# Altium PCB MainBoard_PCB1.PcbDoc
Units mil, origin at the board's own origin, x right, y up, seen from the top; angles counter-clockwise.
Board outline 6000 x 4000 mil, 2 copper layers (Top Layer, Bottom Layer), stack 65.8 mil thick; 35 components, 23 nets, 168 pads, 7 vias.
Unrouted connection lines stored in the file: 43.
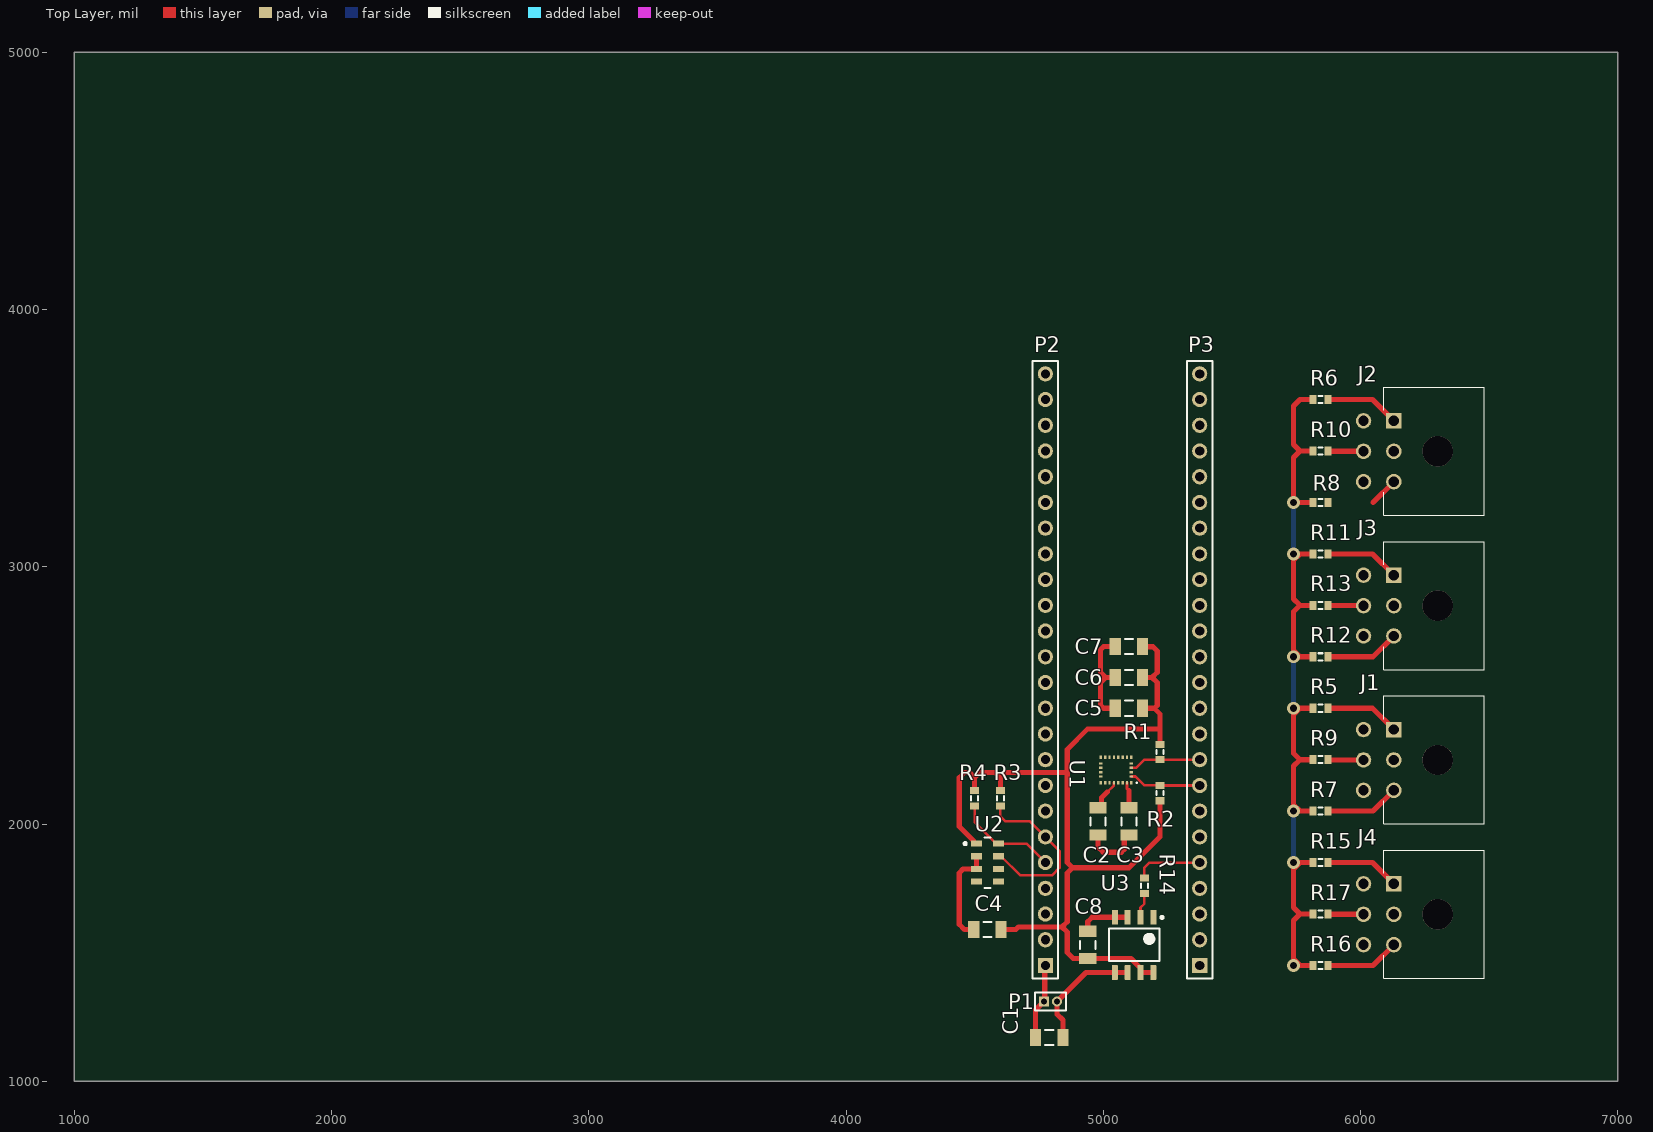
[diagram p0: Top Layer view]
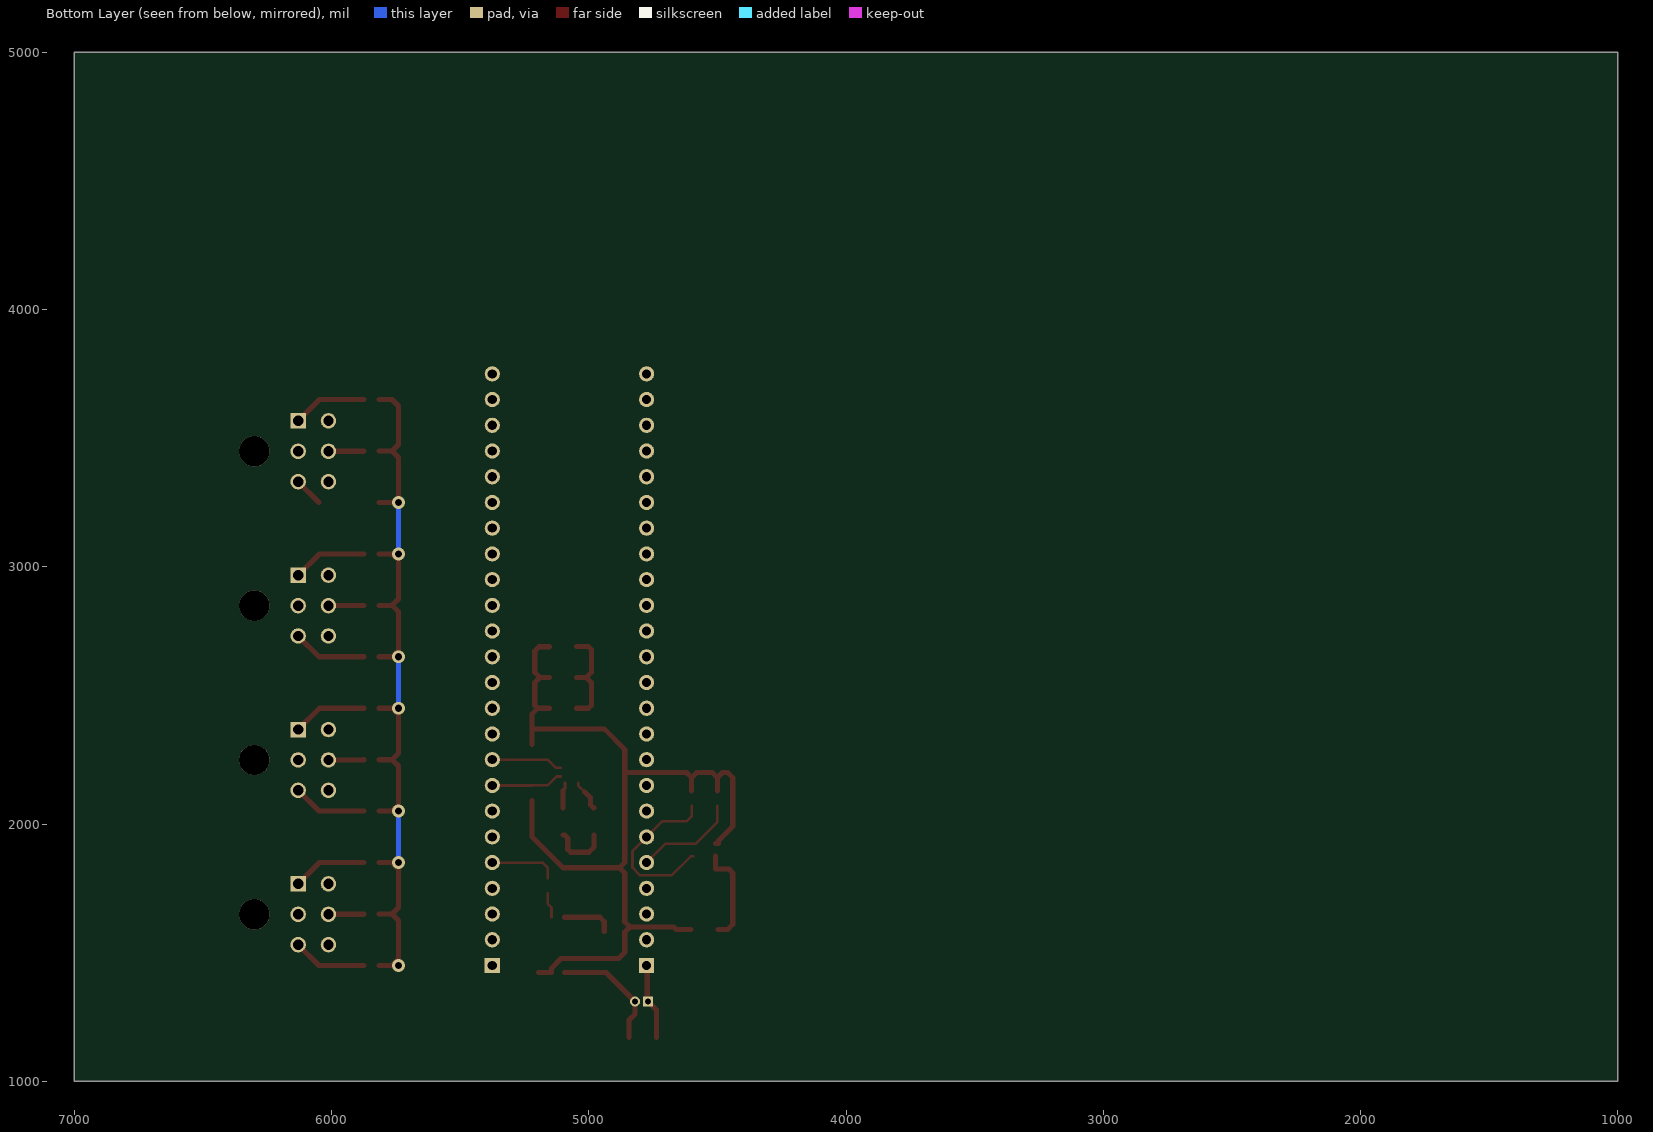
[diagram p1: Bottom Layer view, seen from below]

## Layer stack, top to bottom
Top Solder: solder mask 0.4, Solder Resist, Dk 3.5
Top Layer: signal copper 1.4
Dielectric 1: dielectric 63, FR-4, Dk 4.8
Bottom Layer: signal copper 1.4
Bottom Solder: solder mask 0.4, Solder Resist, Dk 3.5

## Board outline
1000,1000 7000,1000 7000,5000 1000,5000

## Design rules (kind name [scope] priority, off if disabled: settings)
Clearance [All] p1: gap=6 ignorepadtopadclearanceinfootprint=FALSE
PolygonConnect [All] p1: connectstyle=Relief reliefconductorwidth=10 reliefentries=4 polygonreliefangle="90 Angle" airgapwidth=10
RoomDefinition MainBoard_Sheet1 [InComponentClass('MainBoard_Sheet1')] p1: confinementstyle=ConfineIn formatcopy=TRUE lockcomponents=FALSE outline 7025,1075 8275,1075 8275,1725 7025,1725
RoutingVias [All] p1: holewidth=28 width=50 viastyle="Through Hole" minholewidth=28 minwidth=50 maxholewidth=28 maxwidth=50
SolderMaskExpansion [All] p1: expansion=4 istentingtop=FALSE
Width [All] p1: maxlimit=39.37 minlimit=6 preferedwidth=20
30 further rules are at their usual default settings.

## Components (designator, comment, footprint, x,y, rotation, side; value= is the part's Value field where it differs from the comment)
C1 "Cap Semi" C1206 4790,1170 r0 top value=0.1uF
C2 "Cap Semi" C1206 4980,2010 r90 top value=10uF
C3 "Cap Semi" C1206 5100,2010 r90 top value=0.1uF
C4 "Cap Semi" C1206 4550,1590 r0 top value=0.1uF
C5 "Cap Semi" C1206 5100,2450 r0 top value=10uF
C6 "Cap Semi" C1206 5100,2570 r0 top value=0.1uF
C7 "Cap Semi" C1206 5100,2690 r0 top value=0.1uF
C8 "Cap Semi" C1206 4940,1530 r270 top value=10uF
J1 "0430450600" 0430450600 6215,2250 r90 top
J2 "0430450600" 0430450600 6215,3450 r90 top
J3 "0430450600" 0430450600 6215,2850 r90 top
J4 "0430450600" 0430450600 6215,1650 r90 top
P1 "MHDR1X2" MHDR1X2 4770,1310 r0 top
P2 "Header 24" HDR1X24 4775,1450 r90 top
P3 "Header 24" HDR1X24 5375,1450 r90 top
R1 "Res3" J1-0603 5220,2280 r90 top value=10K
R2 "Res3" J1-0603 5220,2120 r270 top value=10K
R3 "Res3" J1-0603 4600,2100 r90 top value=10K
R4 "Res3" J1-0603 4500,2100 r90 top value=10K
R5 "Res3" J1-0603 5844.53,2450 r0 top value=10K
R6 "Res3" J1-0603 5844.53,3650 r0 top value=10K
R7 "Res3" J1-0603 5844.53,2050 r0 top value=10K
R8 "Res3" J1-0603 5844.53,3250 r0 top value=10K
R9 "Res3" J1-0603 5844.53,2250 r0 top value=10K
R10 "Res3" J1-0603 5844.53,3450 r0 top value=10K
R11 "Res3" J1-0603 5844.53,3050 r0 top value=10K
R12 "Res3" J1-0603 5844.53,2650 r0 top value=10K
R13 "Res3" J1-0603 5844.53,2850 r0 top value=10K
R14 "Res3" J1-0603 5160,1760 r270 top value=250K
R15 "Res3" J1-0603 5844.53,1850 r0 top value=10K
R16 "Res3" J1-0603 5844.53,1450 r0 top value=10K
R17 "Res3" J1-0603 5844.53,1650 r0 top value=10K
U1 "LSM9DS1TR" STM-LGA-24_3500X3000X1000 5050,2210 r180 top
U2 "MS560702BA03-50" TECO-MS560702BA03-50_V 4550,1850 r0 top
U3 "TPS76633DR" D0008A_N 5120,1530 r270 top

## Footprints (in the part's own frame and the unit in brackets; to place one, negate y for a bottom-side part, rotate by r counter-clockwise, add the part's x,y. Pads: shape width x height; smd on the part's side, far side on the other; paste and mask are expansions set on the pad)
0430450600 [mm] "6-Pin Molex 3.00mm Pitch"
  round 3 hole 3 unplated mask+0.05: 0(-0.025,-2.16)
  rect 1.53x1.53 hole 1.02 mask+0.05: 1(2.975,2.16)
  round 1.53 hole 1.02 mask+0.05: 2(-0.025,2.16) 3(-3.025,2.16) 4(2.975,5.16) 5(-0.025,5.16) 6(-3.025,5.16)
  silkscreen extent -6.35,-6.75 6.3,3.18, body extent -6.6,-6.7 6.55,5.54, height 8.28
C1206 [mm] "Chip Capacitor, Body 3.2x1.6mm, IPC High Density"
  rect 1.1x1.7 smd: 1(-1.35,0) 2(1.35,0)
  silkscreen extent -0.4,-0.75 0.4,0.75, body extent -1.7,-0.9 1.7,0.9, height 1.3
D0008A_N [mm] "SOIC, 8-Leads, Body 5x4mm, Pitch 1.27mm, IPC Medium Density"
  rrect17% 1.45x0.6 smd: 1(-2.725,1.905) 2(-2.725,0.635) 3(-2.725,-0.635) 4(-2.725,-1.905) 5(2.725,-1.905) 6(2.725,-0.635) 7(2.725,0.635) 8(2.725,1.905)
  silkscreen extent -2.85,-2.5 1.6,2.88, body extent -3,-2.45 3,2.45, height 1.63
HDR1X24 [mm] "Connector; Header; 24 Position"
  rect 1.5x1.5 hole 0.9: 1(0,0)
  round 1.5 hole 0.9: 2(2.54,0) 3(5.08,0) 4(7.62,0) 5(10.16,0) 6(12.7,0) 7(15.24,0) 8(17.78,0) 9(20.32,0) 10(22.86,0) 11(25.4,0) 12(27.94,0) 13(30.48,0) 14(33.02,0) 15(35.56,0) 16(38.1,0) 17(40.64,0) 18(43.18,0) 19(45.72,0) 20(48.26,0) 21(50.8,0) 22(53.34,0) 23(55.88,0) 24(58.42,0)
  silkscreen extent -1.27,-1.27 59.69,1.27
J1-0603 [mm] "Chip Resistor, Body 1.6x0.8mm, IPC High Density"
  rect 0.7x0.9 smd: 1(-0.75,0) 2(0.75,0)
  silkscreen extent -0.2,-0.35 0.2,0.35, body extent -0.85,-0.48 0.85,0.48, height 0.9
MHDR1X2 [mm] "Connector; Header; 2 Position"
  rect 1x1 hole 0.6: 1(0,0)
  round 1 hole 0.6: 2(1.27,0)
  silkscreen extent -0.9,-0.9 2.17,0.9
STM-LGA-24_3500X3000X1000 [mm] "LGA, 24-Leads, Body 3.65x3.15mm, Pitch 0.43mm"
  rect 0.23x0.35 smd mask+0.05: 1(-1.505,1.25) 6(-1.505,-1.25) 7(-1.075,-1.25) 8(-0.645,-1.25) 9(-0.215,-1.25) 10(0.215,-1.25) 11(0.645,-1.25) 12(1.075,-1.25) 13(1.505,-1.25) 18(1.505,1.25) 19(1.075,1.25) 20(0.645,1.25) 21(0.215,1.25) 22(-0.215,1.25) 23(-0.645,1.25) 24(-1.075,1.25)
  rect 0.35x0.23 smd mask+0.05: 2(-1.505,0.645) 3(-1.505,0.215) 4(-1.505,-0.215) 5(-1.505,-0.645) 14(1.505,-0.645) 15(1.505,-0.215) 16(1.505,0.215) 17(1.505,0.645)
  silkscreen extent -2.11,1.19 -1.98,1.31, body extent -1.82,-1.57 1.83,1.58, height 1.03
TECO-MS560702BA03-50_V [mm] "SMD, 8-Leads, Body 3x5mm, Pitch 1.25mm"
  rect 1.1x0.6 smd: 1(-1.1,1.875) 2(-1.1,0.625) 3(-1.1,-0.625) 4(-1.1,-1.875) 5(1.1,-1.875) 6(1.1,-0.625) 7(1.1,0.625) 8(1.1,1.875)
  silkscreen extent -2.32,-2.5 0.32,2.5, body extent -1.5,-2.5 1.5,2.5, height 1

## Part data
C1 C2 C3 C4 C5 C6 C7 C8: "Capacitor (Semiconductor SIM Model)", LatestRevisionDate=29-May-2009, LatestRevisionNote="IPC-7351 Footprint Added.", PackageDescription="Chip Capacitor", PackageReference=C1206, Published=8-Jun-2000, Publisher="Altium Limited"
J1 J2 J3 J4: "CONN HEADER R/A 6POS 3MM", Current Rating (Amps)=8A, Insulation Color=Black, Manufacturer=Molex, Material Flammability Rating="UL94 V-0", Supplier Part Number 1=WM1815-ND, Voltage Rating=600V, ComponentLink1Description=Drawing, ComponentLink1URL=https://www.molex.com/pdm_docs/sd/430450600_sd.pdf, ComponentLink2Description="Product Specification", ComponentLink2URL=https://www.molex.com/pdm_docs/ps/PS-43045.pdf, Contact Finish - Mating=Tin, Contact Finish - Post=Tin, Contact Finish Thickness - Mating="100.0µin (2.54µm)", Contact Length - Post="0.125\" (3.18mm)", Contact Material=Brass, Contact Shape=Square, Contact Type="Male Pin", Fastening Type="Locking Ramp", Features="Board Lock", Insulation Height="0.290\" (7.37mm)", Insulation Material="Liquid Crystal Polymer (LCP), Glass Filled", Manufacturer Part Number=0430450600, Mounting Type="Through Hole, Right Angle", Number of Positions=6, Number of Rows=2, Row Spacing - Mating="0.118\" (3.00mm)", Shrouding="Shrouded - 4 Wall", Supplier 1=Digi-Key, Termination=Solder
P1: "Header, 2-Pin", LatestRevisionDate=17-Jul-2002, LatestRevisionNote="Re-released for DXP Platform.", Publisher="Altium Limited"
P2 P3: "Header, 24-Pin", LatestRevisionDate=17-Jul-2002, LatestRevisionNote="Re-released for DXP Platform.", Publisher="Altium Limited"
R1 R2 R3 R4 R5 R6 R7 R8 R9 R10 R11 R12 R13 R14 R15 R16 R17: "Resistor", LatestRevisionDate=29-May-2009, LatestRevisionNote="IPC-7351 Footprint Added.", PackageDescription="Chip Resistor", PackageReference=J1-0603, Published=8-Jun-2000, Publisher="Altium Limited"
U1: library part CMP-2000-06606-1, "iNEMO Inertial Module: 3D Accelerometer, 3D Gyroscope, 3D Magnetometer, 1.9 to 3.6 V, -40 to 85 degC, 24-Pin LGA, RoHS, Tape and Reel", Manufacturer=STMicroelectronics, Package Description="24-Pin Plastic Land Grid Array Package, Body 3.65 x 3.15 mm, Pitch 0.43 mm", Package Reference=LGA-24_3500X3000X1000, PartNumber=LSM9DS1, Sensor Case Style=LGA, Supply Voltage Max=3.6V, Supply Voltage Min=1.9V, Acceleration Range=±2g,±4g,±8g,±16g, Datasheet URL=http://www2.st.com/content/ccc/resource/technical/document/datasheet/1e/3f/2a/d6/25/eb/48/46/DM00103319.pdf/files/DM00103319.pdf/jcr:content/translations/en.DM00103319.pdf, Datasheet Version="Rev. 3, 03/2015", Gyroscope Range=±245°/s,±500°/s,±2000°/s, Manufacturer URL=http://www.st.com/, MEMS Module Function=Tri-AxisGyroscope,Tri-AxisAccelerometer,Tri-AxisMagnetometer, Mounting Technology=SurfaceMount, MSL=MSL3-168hours, No. of Pins=24Pins, Packaging=CutTape, Product Range=-, SVHC=NoSVHC(17-Dec-2015)
U2: library part CMP-2000-07512-1, "Barometric Pressure Sensor, with Stainless Steel Cap , 1.8 to 3.6 V, -40 to 85 degC, 8-Pin SMD, RoHS, Tape and Reel", Manufacturer="TE Connectivity", Package Description="8-Pin Surface Mount Device, Body 3 x 5 mm, Pitch 1.25 mm", Datasheet URL=http://www.te.com/commerce/DocumentDelivery/DDEController?Action=showdoc&DocId=Data+Sheet%7FMS5607-02BA03%7FB2%7Fpdf%7FEnglish%7FENG_DS_MS5607-02BA03_B2.pdf%7FMS560702BA03-50, Datasheet Version=06/2017, Lead Free=LeadFree, Manufacturer URL=http://www.te.com/, Mounting Technology=SurfaceMount, Package Reference=MS560702BA03-50, RoHSCompliant=false
U3: library part CMP-0394-00013-2, "Single Output LDO, 250 mA, Fixed 3.3 V Output, 2.7 to 10 V Input, with Low IQ, 8-pin SOIC (D), -40 to 125 degC, Green (RoHS & no Sb/Br)", Manufacturer="Texas Instruments", Power Good=TRUE, Code_JEDEC=MS-012, ComponentLink1Description="Manufacturer URL", ComponentLink1URL=http://www.ti.com/, ComponentLink2Description=Datasheet, ComponentLink2URL=http://www.ti.com/general/docs/lit/getliterature.tsp?genericPartNumber=TPS76633&fileType=pdf, ComponentLink3Description="Package Specification", ComponentLink3URL=http://www.ti.com/litv/pdf/msoi002j, DatasheetVersion=SLVS237C, Eco-Plan="Green (RoHS & no Sb/Br)", Fixed Output Options(V)=3.3, Iout(Max)(A)=0.25, Iq(Typ)(mA)=0.03, Mounting Technology="Surface Mount", PackageDescription="8-Pin Plastic Small Outline, Body 4.9 x 3.9 mm, Pitch 1.27 mm", PackageReference=D0008A, PackageVersion=4040047-3/M, PartNumber=TPS76633DR, SubFamily="Single Channel LDO", Vdo(Typ)(mV)=230, Vin(Max)(V)=10, Vin(Min)(V)=2.7, Vout Adj(Max)(V)=3.3, Vout Adj(Min)(V)=3.3

## Via types
v1: diameter 50, hole 28, Top Layer to Bottom Layer, 7 vias

## Nets (pads, with @x,y where several pads share a name; then routed paths per layer and width w, separated by ;. In a path a pad name is that pad's centre, name@x,y a point inside that pad or via, vN(x,y) a via of type N, cw(c..) or ccw(c..) an arc to the next point about the centre after c; other vN are vias at no path point)
A0: J4.1 P3.14 R15.2 | length 290.2
  Top Layer w20: R15.2 6047.09,1850 J4.1
A1: J4.5 P3.13 R17.2 | length 138.2
  Top Layer w20: R17.2 5875.04,1649.02 J4.5
A2: J4.3 P3.12 R16.2 | length 289.4
  Top Layer w20: R16.2 6049.06,1450 J4.3
A14: J2.1 P3.24 R6.2 | length 290.2
  Top Layer w20: R6.2 6047.09,3650 J2.1
A15: J2.5 P3.23 R10.2 | length 138.2
  Top Layer w20: R10.2 5875.04,3449.02 J2.5
A16: J2.3 P3.22 R8.2 | length 119.4
  Top Layer w20: P3.22@5375,3545 P3.22 ; 6049.06,3250 J2.3
A17: J3.1 P3.21 R11.2 | length 290.2
  Top Layer w20: R11.2 6047.09,3050 J3.1
A18: J3.5 P3.20 R13.2 | length 138.2
  Top Layer w20: R13.2 5875.04,2849.02 J3.5
A19: J3.3 P3.19 R12.2 | length 289.4
  Top Layer w20: R12.2 6049.06,2650 J3.3
A20: J1.1 P3.18 R5.2 | length 290.2
  Top Layer w20: R5.2 6047.09,2450 J1.1
A21: J1.5 P3.17 R9.2 | length 138.2
  Top Layer w20: R9.2 5875.04,2249.02 J1.5
A22: J1.3 P3.16 R7.2 | length 289.4
  Top Layer w20: R7.2 6049.06,2050 J1.3
GND: C1.1 C2.1 C3.1 C4.1 C5.1 C6.1 C7.1 C8.1 J1.2 J1.4 J1.6 J2.2 J2.4 J2.6 J3.2 J3.4 J3.6 J4.2 J4.4 J4.6 P1.1 P2.1 P3.15 U1.14 U1.15 U1.16 U1.17 U1.18 U1.19 U1.20 U2.2 U2.3 U3.3 U3.4 | length 1503.9
  Top Layer w20: C4.1 4460,1590 4440,1610 4440,1810 4455.04,1825.04 4506.34,1825.04 U2.3 U2.2 ; C1.1 4736.85,1276.85 P1.1 4772.5,1312.5 4772.5,1447.5 P2.1 ; C8.1 4940,1620 4957.28,1637.28 U3.4 U3.3 ; C2.1 4980,1910 5000,1890 5070,1890 5081.72,1901.72 5081.72,1945.2 5093.37,1956.85 C3.1 ; C5.1 5001.72,2450 4990,2461.72 4990,2550 5010,2570 ; C6.1 5010,2570 ; C7.1 5001.72,2690 4990,2678.28 4990,2590 5010,2570
NetC1_2: C1.2 P1.2 U3.5 U3.6 | length 471.3
  Top Layer w20: C1.2 4843.15,1237.54 4820.37,1260.31 4820.37,1309.63 P1.2 4932.72,1422.72 U3.5 U3.6
NetC2_2: C2.2 U1.21 | length 124.4
  Top Layer w10: 5015.55,2124.76 5041.06,2150.27 5041.06,2160.31 U1.21
  Top Layer w20: C2.2 4982.23,2063.15 4993.88,2074.8 4993.88,2103.09 5015.55,2124.76
NetC3_2: C3.2 U1.24 | length 100.8
  Top Layer w10: U1.24 5092.32,2137.68 5100,2130
  Top Layer w20: C3.2 5100,2130
NetR14_2: R14.2 U3.2 | length 99.4
  Top Layer w10: U3.2 5145,1675 5160,1690 R14.2
PWR_OK: P3.5 R14.1 | length 263.8
  Top Layer w10: R14.1 5160,1830 5180,1850 P3.5
SCL0: P3.8 R2.1 U1.2 | length 280.5
  Top Layer w10: U1.2 5125.39,2184.61 5160,2150 5219.53,2150 R2.1 5220.24,2149.76 5374.76,2149.76 P3.8
SCL2: P2.5 R4.1 U2.8 | length 403.3
  Top Layer w10: R4.1 4500,2007.28 4583.46,1923.82 U2.8 4701.18,1923.82 P2.5
SDA0: P3.9 R1.1 U1.4 | length 279.2
  Top Layer w10: U1.4 5109.72,2218.94 5128.94,2218.94 5160,2250 5219.53,2250 R1.1 5220.24,2250.24 5374.76,2250.24 P3.9
SDA2: P2.6 R3.1 U2.7 | length 671.4
  Top Layer w10: U2.7 4603.15,1874.61 4677.76,1800 4800,1800 4830,1830 4830,1895 P2.6 4715,2010 4620,2010 4600,2030 R3.1
VCC: C4.2 C5.2 C6.2 C7.2 C8.2 P3.1 R1.2 R2.2 R3.2 R4.2 R5.1 R6.1 R7.1 R8.1 R9.1 R10.1 R11.1 R12.1 R13.1 R15.1 R16.1 R17.1 U1.1 U1.3 U1.22 U1.23 U2.1 U3.7 U3.8 | length 6711.4
  Top Layer w20: R4.2 4500,2180 ; U2.1 4496.85,1923.82 4495.04,1925.63 4495.04,1935.47 4440,1990.51 4440,2180 4460,2200 4480,2200 4500,2180 ; R3.2 4600,2180 ; C4.2 4660,1590 4670,1600 4840,1600 ; C5.2 5198.28,2450 ; C6.2 5190,2570 ; C7.2 5153.88,2689.27 5193.09,2689.27 5210,2672.36 5210,2590 5190,2570 ; U3.8 U3.7 5145,1439.45 5107.6,1476.85 C8.2 4883.15,1476.85 4860,1500 4860,1580 4840,1600 ; R2.2 5220,1950 5100,1830 4880,1830 ; R1.2 5220,2368.91 ; v1(5740,3250) R8.1 ; 5740,3275 5740,3425 5765,3450 ; R16.1 5765,1450 5740,1475 5740,1625 5765,1650 ; R17.1 5765,1650 ; R15.1 5765,1850 5740,1825 5740,1675 5765,1650 ; R7.1 5765,2050 5740,2075 5740,2225 5765,2250 ; R9.1 5765,2250 ; R5.1 5765,2450 5740,2425 5740,2275 5765,2250 ; R12.1 5765,2650 5740,2675 5740,2825 5765,2850 ; R13.1 5765,2850 ; R11.1 5765,3050 5740,3025 5740,2875 5765,2850 ; R10.1 5765,3450 ; R6.1 5765,3650 5740,3625 5740,3475 5765,3450 ; 4500,2180 4520,2200 4580,2200 4600,2180 ; 4600,2180 4620,2200 4860,2200 ; 4840,1600 4860,1620 4860,1810 4880,1830 ; 4860,2200 4860,2290 4940,2370 5218.91,2370 5220,2368.91 ; 4860,2200 4860,1850 4880,1830 ; 5190,2570 5210,2550 5210,2461.72 5198.28,2450 ; 5198.28,2450 5220,2428.28 5220,2368.91
  Bottom Layer w20: v1(5740,1850) v1(5740,2050) ; v1(5740,2450) v1(5740,2650) ; v1(5740,3050) v1(5740,3250)
  other v1: 5740,1450
pads on no net: J1.0 J2.0 J3.0 J4.0 P2.2 P2.3 P2.4 P2.7 P2.8 P2.9 P2.10 P2.11 P2.12 P2.13 P2.14 P2.15 P2.16 P2.17 P2.18 P2.19 P2.20 P2.21 P2.22 P2.23 P2.24 P3.2 P3.3 P3.4 P3.6 P3.7 P3.10 P3.11 U1.5 U1.6 U1.7 U1.8 U1.9 U1.10 U1.11 U1.12 U1.13 U2.4 U2.5 U2.6 U3.1

## Polygon pours and split planes (outlines as drawn)
no net on Top Layer "NONET_L01_P000" (solid, pour order 0): 2500,4725